# EAGLE board DorMouse-V0.5 (EAGLE 6.3)

Size 36.81 x 37.77 mm. Coordinates in mm from the lower left corner, seen from the top.
Outline: 0,0 36.81,0 36.81,37.77 0,37.77 0,0
Copper layers (1*16): Top 0.035mm / dielectric 1.5mm / Bottom 0.035mm
Design rules "default": minimum track width 10mil, minimum drill 24mil, track to track 8mil, track to pad 8mil, pad to pad 8mil, via to via 8mil, smd to smd 8mil, copper to edge 40mil, drill to drill 8mil, minimum pad ring 10mil, minimum via ring 8mil, stop-mask expansion 4mil, vias tented up to drill 0mil, thermal gap 10mil

## Footprints (pad centres in the part's own frame; a part is rotated, then mirrored left to right if it is on the bottom)
C0402 = smd 0.7 x 0.9: 1 -0.65,0; 2 0.65,0
TQFP44 = smd 1.5 x 0.5: 1 -5.8,4; 2 -5.8,3.2; 3 -5.8,2.4; 4 -5.8,1.6; 5 -5.8,0.8; 6 -5.8,0; 7 -5.8,-0.8; 8 -5.8,-1.6; 9 -5.8,-2.4; 10 -5.8,-3.2; 11 -5.8,-4; 23 5.8,-4; 24 5.8,-3.2; 25 5.8,-2.4; 26 5.8,-1.6; 27 5.8,-0.8; 28 5.8,0; 29 5.8,0.8; 30 5.8,1.6; 31 5.8,2.4; 32 5.8,3.2; 33 5.8,4 | smd 0.5 x 1.5: 12 -4,-5.8; 13 -3.2,-5.8; 14 -2.4,-5.8; 15 -1.6,-5.8; 16 -0.8,-5.8; 17 0,-5.8; 18 0.8,-5.8; 19 1.6,-5.8; 20 2.4,-5.8; 21 3.2,-5.8; 22 4,-5.8; 34 4,5.8; 35 3.2,5.8; 36 2.4,5.8; 37 1.6,5.8; 38 0.8,5.8; 39 0,5.8; 40 -0.8,5.8; 41 -1.6,5.8; 42 -2.4,5.8; 43 -3.2,5.8; 44 -4,5.8
AVR-ISP-6 = drill 1.016 square: 1 -2.54,-1.27 | drill 1.016 octagon: 2 -2.54,1.27; 3 0,-1.27; 4 0,1.27; 5 2.54,-1.27; 6 2.54,1.27
CHIP-LED0603 = smd 0.8 x 0.8: A 0,-0.75; C 0,0.75
SMD1,27-2,54 = smd 1.27 x 2.54: 1 0,0
QS = drill 0.61 long: 1 -2.54,0; 2 2.54,0
R0402 = smd 0.7 x 0.9: 1 -0.65,0; 2 0.65,0
SOIC8 = smd 0.5 x 2.2: 1 -1.905,-3.154; 2 -0.645,-3.154; 3 0.625,-3.154; 4 1.895,-3.154; 5 1.905,3.154; 6 0.635,3.154; 7 -0.635,3.154; 8 -1.905,3.154
LGA-8 = smd 1.05 x 0.55: 1 0.35,4; 2 0.35,2.75; 3 0.35,1.5; 4 0.35,0.25; 5 2.45,0.25; 6 2.45,1.5; 7 2.45,2.75; 8 2.45,4
LGA-14 = smd 1.145 x 0.55: 1 -1.2,1.1; 2 -1.2,0.3; 3 -1.2,-0.5; 4 -1.2,-1.3; 5 -1.2,-2.1; 6 -1.2,-2.9; 8 1,-2.9; 9 1,-2.1; 10 1,-1.3; 11 1,-0.5; 12 1,0.3; 13 0.995,1.1 | smd 0.55 x 1.145: 7 -0.1,-3; 14 -0.1,1.2
UBLOX_MAX-6 = smd 1.8 x 0.7: 1_GND 4.95,-4.4; 9_V_RESET 4.95,4.3; 10_GND -4.55,4.3; 18_RESERVED -4.55,-4.4 | smd 1.8 x 0.8: 2_TXD1 4.95,-3.35; 3_RXD1 4.95,-2.25; 4_TIMEPULSE 4.95,-1.15; 5_EXTINT0 4.95,-0.05; 6_V_BCKP 4.95,1.05; 7_VCC_IO 4.95,2.15; 8_VCC 4.95,3.25; 11_RF_IN -4.55,3.25; 12_GND -4.55,2.15; 13_ANTON -4.55,1.05; 14_VCC_RF -4.55,-0.05; 15_RESERVED -4.55,-1.15; 16_SDA2 -4.55,-2.25; 17_SCL2 -4.55,-3.35

## Placement (x,y rotation side)
C1  22pF  [C0402]  -25.4,43.18 0 top  (outside the outline)
C2  22pF  [C0402]  -31.75,43.18 0 top  (outside the outline)
C3  1uF  [C0402]  -36.83,43.18 0 top  (outside the outline)
C4  1uF  [C0402]  -41.91,43.18 0 top  (outside the outline)
IC1  ATMEGA644A  [TQFP44]  27.94,11.43 0 top
JP1  AVR-ISP-6  [AVR-ISP-6]  30.48,33.02 180 top
LED1  [CHIP-LED0603]  28.02,2.65 180 top
LED2  [CHIP-LED0603]  26.63,2.65 180 top
LED3  [CHIP-LED0603]  25.44,2.65 180 top
LED4  [CHIP-LED0603]  24.25,2.65 180 top
PAD1  [SMD1,27-2,54]  22.93,35.56 0 top
PAD2  [SMD1,27-2,54]  24.99,35.56 0 top
Q1  20MHz  [QS]  16.51,10.16 90 top
R1  [R0402]  33.01,28.36 90 top
R2  3k3  [R0402]  -46.99,43.18 0 top  (outside the outline)
R3  [R0402]  31.41,28.35 90 top
R4  [R0402]  18.66,32.81 180 top
R5  [R0402]  -26.67,46.99 0 top  (outside the outline)
R6  [R0402]  -30.48,46.99 0 top  (outside the outline)
SPI-SRAM  23LC1024  [SOIC8]  13.97,21.59 270 top
U$1  MPL115A1  [LGA-8]  16.51,34.29 180 top
U$2  ADXL345  [LGA-14]  26.67,22.86 90 top
U$3  UBLOX_MAX-6  [UBLOX_MAX-6]  6.95,10.16 180 bottom

## Library data of the parts
C1-C4 R1-R6 = rcl
IC1 = atmel; MPN: ATMEGA644PV-10AU; OC_FARNELL: 1455123; OC_NEWARK: 58M3748
JP1 = avr-5
LED1-LED4 = led
PAD1 PAD2 = wirepad
Q1 = special
SPI-SRAM U$1-U$3 = Swallow

## Nets
ACC-INT1: U$2.8
ACC-INT2: U$2.9
AVCC: IC1.27
AVR-INT0: IC1.11 U$3.4_TIMEPULSE
AVR-INT1: IC1.12
AVR-RX: IC1.9 U$3.2_TXD1
AVR-TX: IC1.10 U$3.3_RXD1
CS-ACC1: IC1.35 U$2.7
CS-ACC2: IC1.34
CS-BARO: IC1.36 U$1.5
CS-SRAM: IC1.37 SPI-SRAM.1
GND: C1.1 C2.1 C3.1 C4.1 IC1.6 IC1.18 IC1.28 IC1.39 JP1.6 PAD1.1 R3.1 R4.1 R5.1 R6.1 SPI-SRAM.4 U$1.3 U$2.2 U$2.4 U$2.5 U$2.11 U$3.1_GND U$3.6_V_BCKP U$3.10_GND U$3.12_GND
N$1: C1.2 IC1.7 Q1.2
N$2: C2.2 IC1.8 Q1.1
N$3: C3.2 U$1.2
N$4: U$3.5_EXTINT0
N$5: SPI-SRAM.3
N$7: IC1.16 LED1.A
N$8: SPI-SRAM.7
N$9: IC1.15 LED2.A
N$11: U$2.10
N$12: IC1.14 LED3.A
N$13: IC1.13 LED4.A
N$14: LED1.C R3.2
N$15: R2.2 U$3.9_V_RESET
N$16: U$3.13_ANTON
N$17: LED2.C R5.2
N$18: U$3.11_RF_IN
N$19: LED3.C R4.2
N$20: U$3.15_RESERVED
N$21: U$3.16_SDA2
N$22: U$3.17_SCL2
N$23: U$3.18_RESERVED
N$24: U$3.14_VCC_RF
N$25: LED4.C R6.2
PC0: IC1.19
PC1: IC1.20
PC2: IC1.21
PC3: IC1.22
PC4: IC1.23
PC5: IC1.24
PC6: IC1.25
PC7: IC1.26
RESET: IC1.4 JP1.5 PAD2.1 R1.1
SPI-MISO: IC1.2 JP1.1 SPI-SRAM.2 U$1.6 U$2.12
SPI-MOSI: IC1.1 JP1.4 SPI-SRAM.5 U$1.7 U$2.13
SPI-SCK: IC1.3 JP1.3 SPI-SRAM.6 U$1.8 U$2.14
VCC: C4.2 IC1.5 IC1.17 IC1.38 JP1.2 R1.2 R2.1 SPI-SRAM.8 U$1.1 U$1.4 U$2.1 U$2.3 U$2.6 U$3.7_VCC_IO U$3.8_VCC

## Tracks (layer width: path | path; a pad name or v marks a point on that pad's centre or on a via)
AVR-INT0  (1 unrouted)
AVR-RX  (1 unrouted)
AVR-TX  (1 unrouted)
CS-ACC1  (1 unrouted)
CS-BARO  (1 unrouted)
CS-SRAM  (1 unrouted)
GND  (23 unrouted)
N$1  (2 unrouted)
N$2  (2 unrouted)
N$3  (1 unrouted)
N$7  (1 unrouted)
N$9  (1 unrouted)
N$12  (1 unrouted)
N$13  (1 unrouted)
N$14  (1 unrouted)
N$15  (1 unrouted)
N$17  (1 unrouted)
N$19  (1 unrouted)
N$25  (1 unrouted)
RESET  (3 unrouted)
SPI-MISO  (4 unrouted)
SPI-MOSI  (4 unrouted)
SPI-SCK  (4 unrouted)
VCC  (14 unrouted)